# Altium PCB alarmClock.PcbDoc
Units mm, origin at the board's own origin, x right, y up, seen from the top; angles counter-clockwise.
Board outline 80.2 x 100.2 mm, 2 copper layers (Top Layer, Bottom Layer); 155 components, 147 nets, 549 pads, 0 vias.
Unrouted connection lines stored in the file: 316.
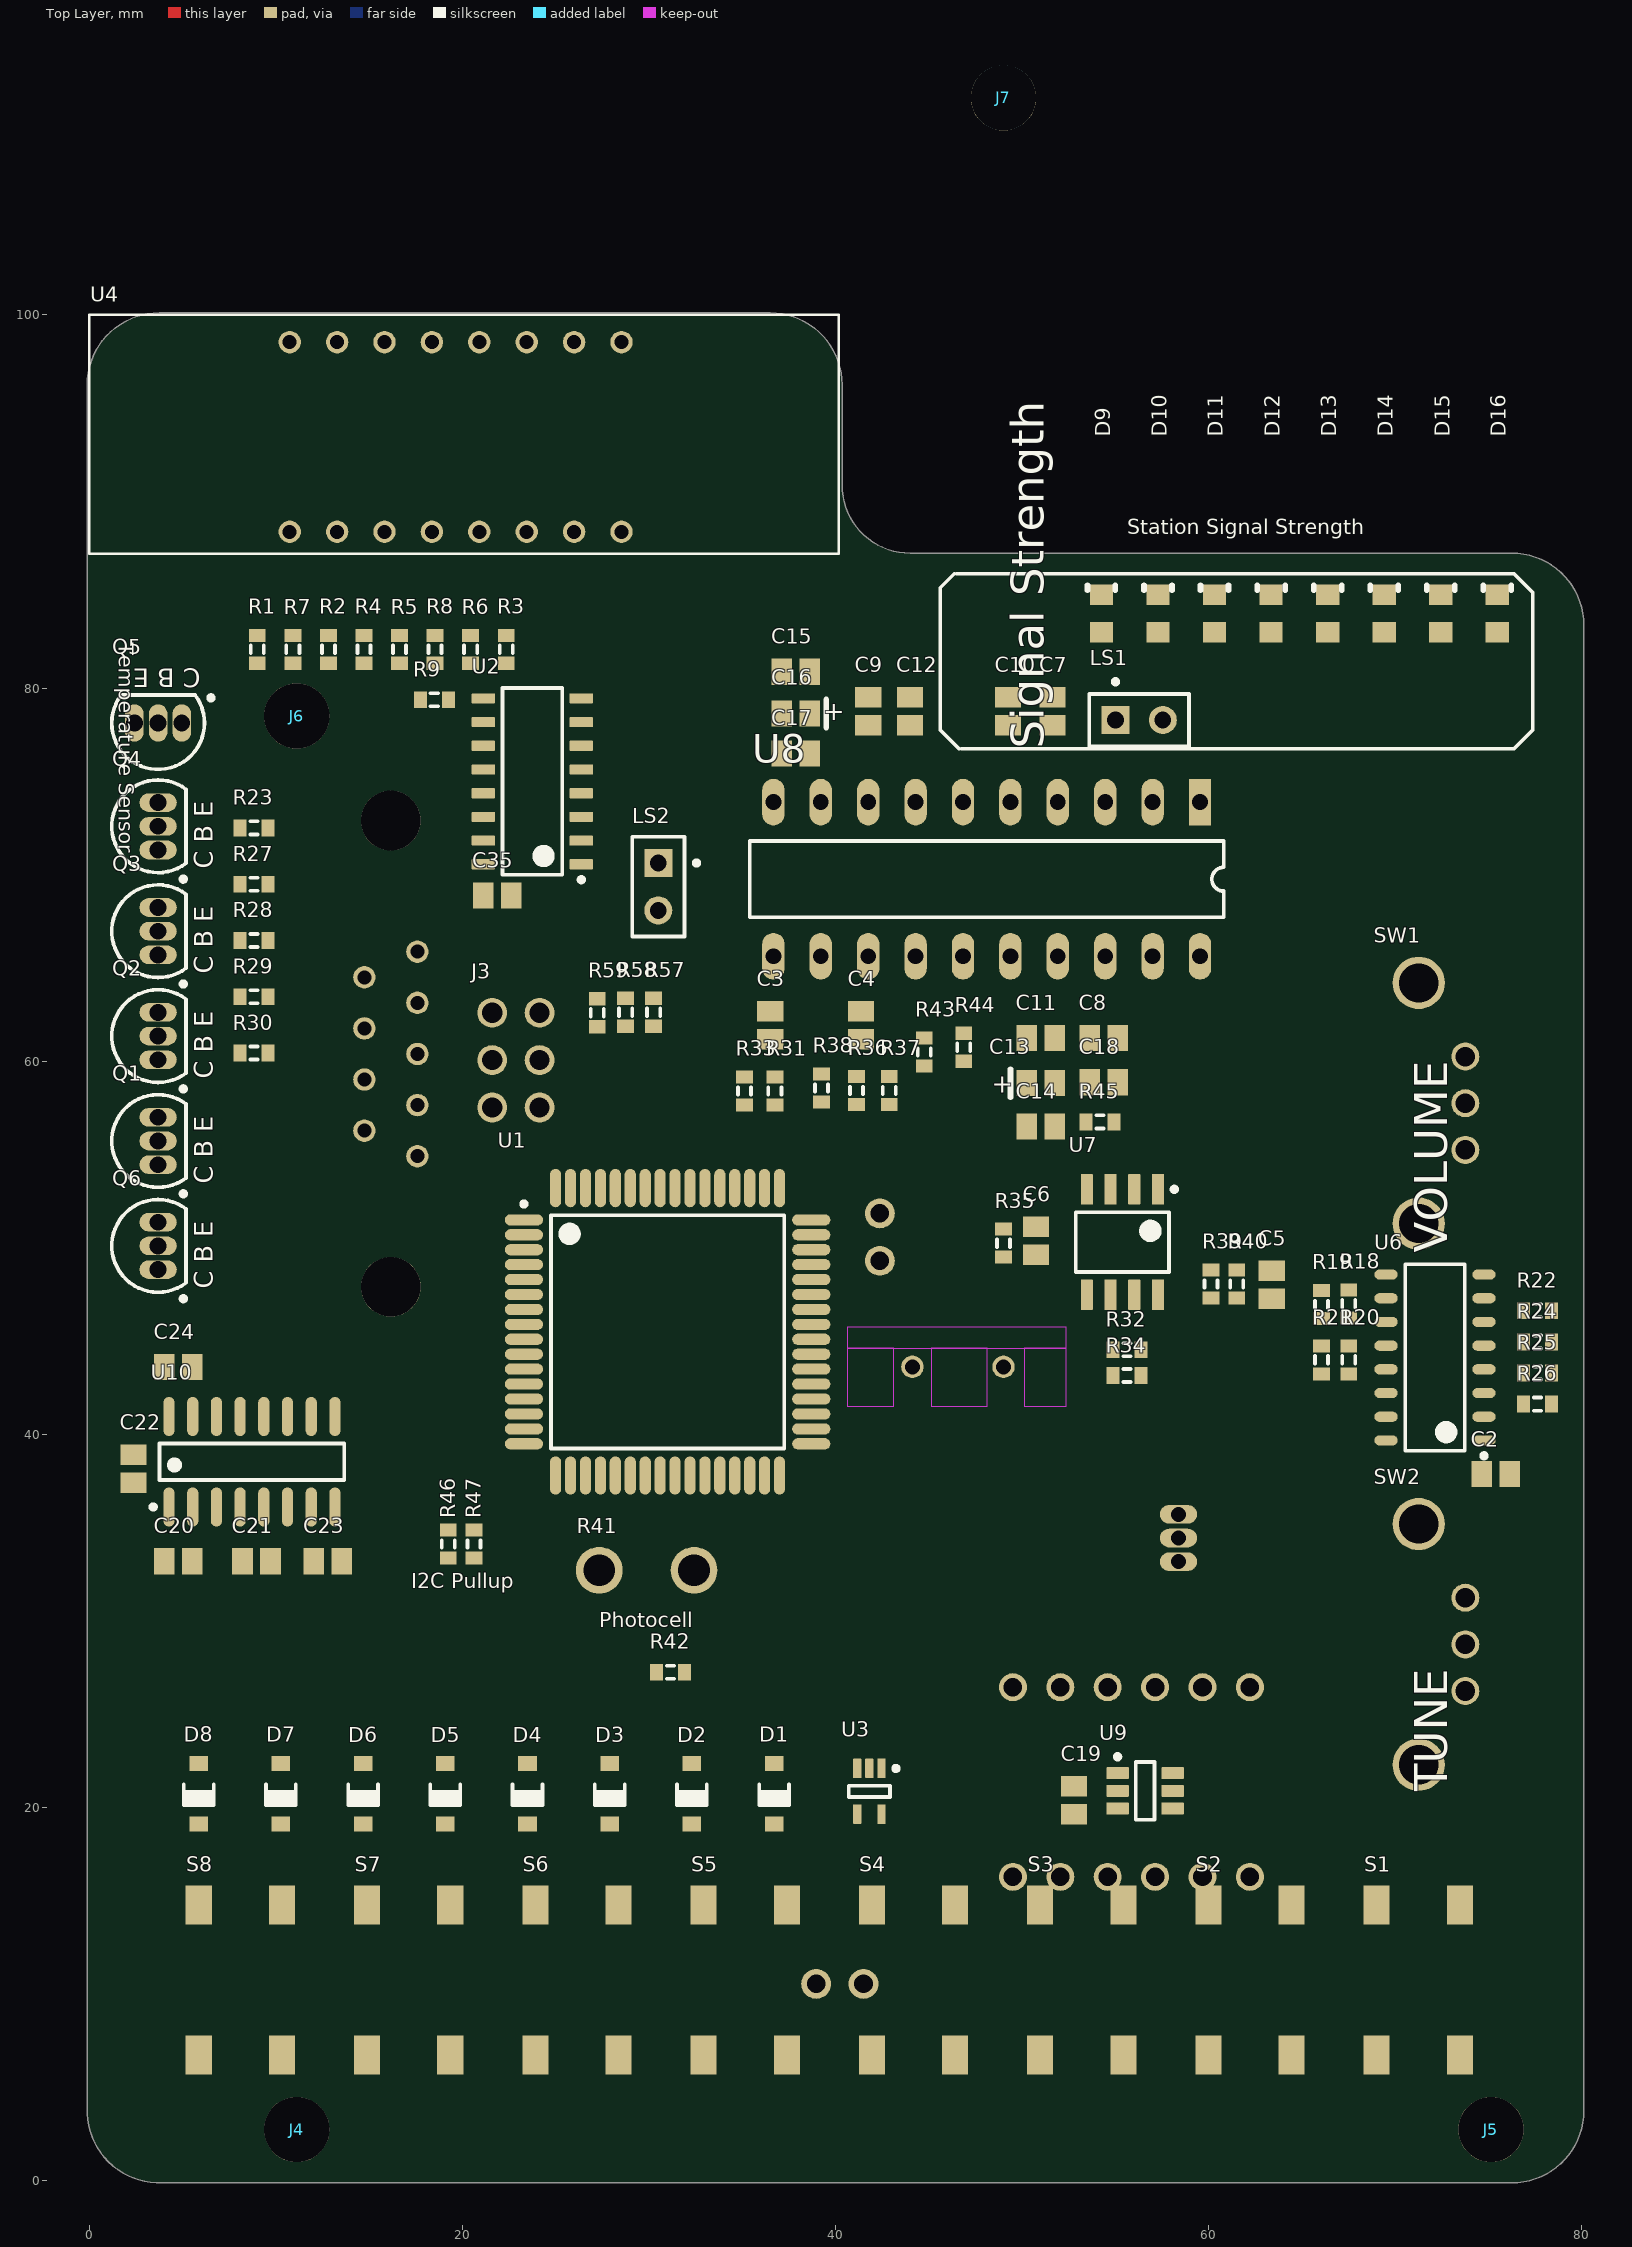
[diagram p0: Top Layer view]
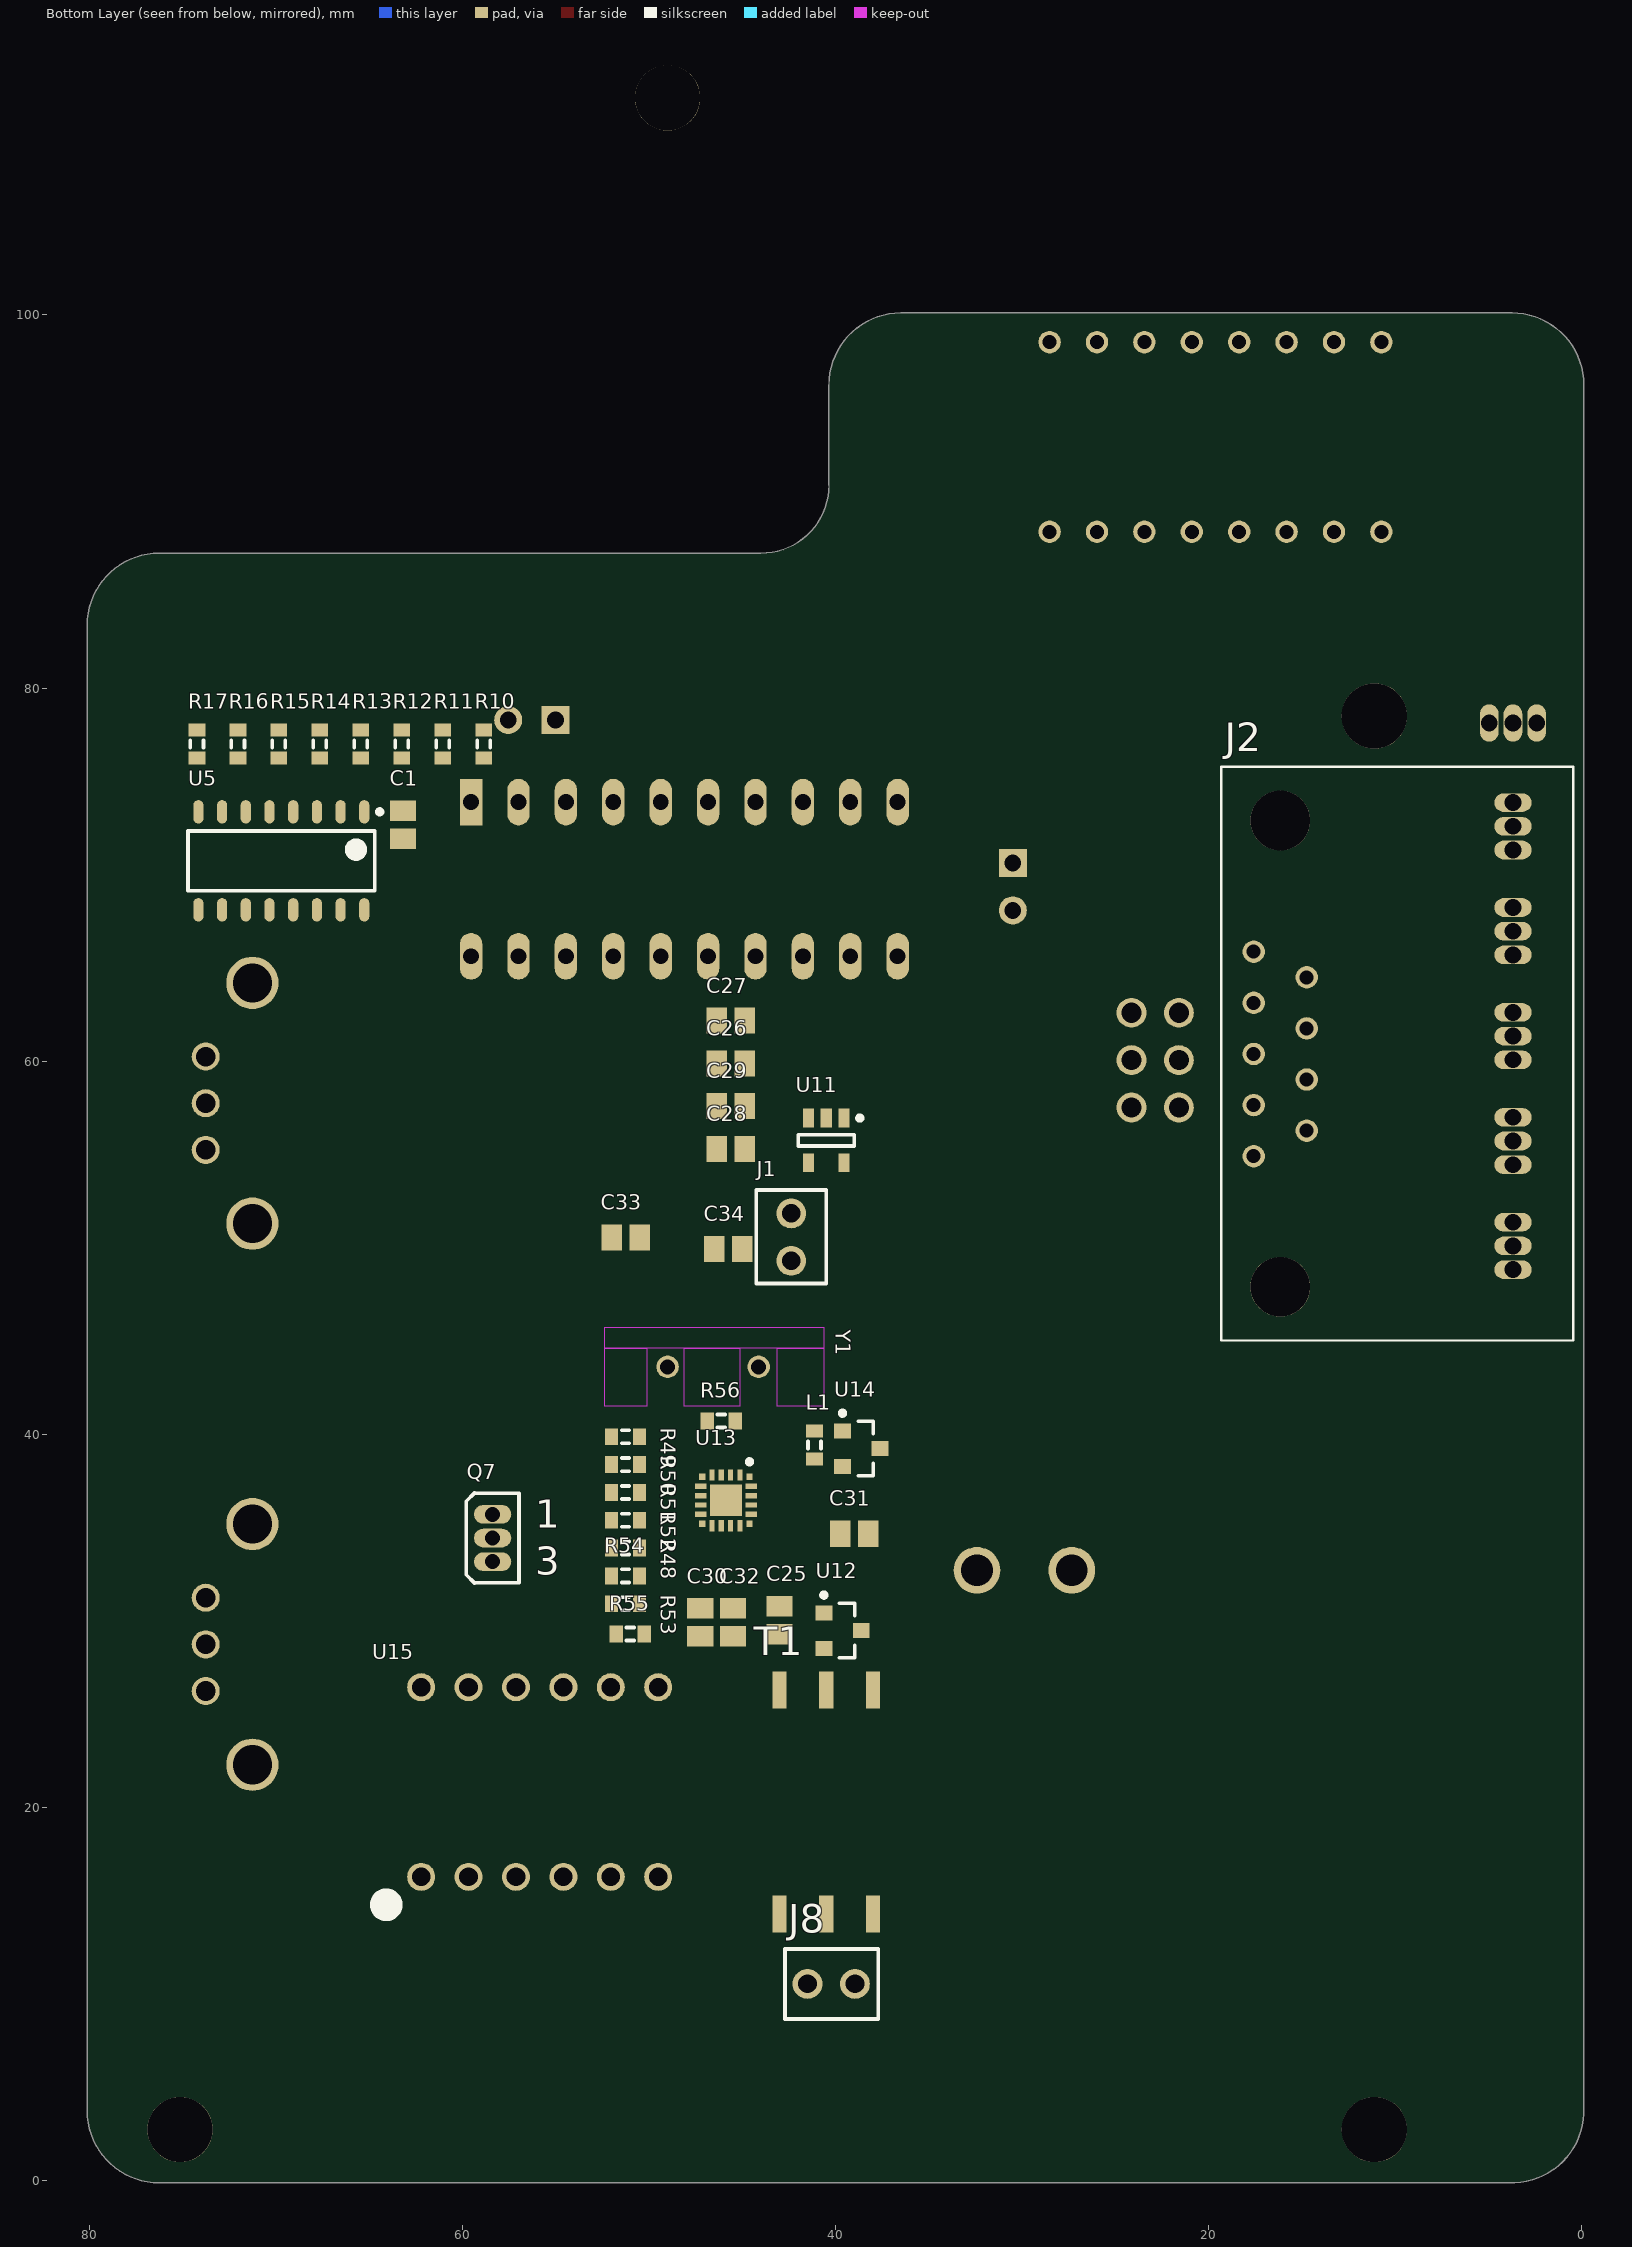
[diagram p1: Bottom Layer view, seen from below]

## Layer stack, top to bottom
Top Solder: solder mask 0.0102, Solder Resist, Dk 3.5
Top Layer: signal copper 0.0356
Dielectric 1: dielectric 0.32, FR-4, Dk 4.8
Bottom Layer: signal copper 0.0356
Bottom Solder: solder mask 0.0102, Solder Resist, Dk 3.5

## Board outline
3.601,-0.098 cw(c3.75,3.75) -0.098,3.601 cw(c0,3.625) -0.1,3.625 -0.1,96.25 cw(c3.75,96.25) 3.75,100.1 36.5,100.1 cw(c36.5,96.25) 40.35,96.25 40.35,90.875 ccw(c44,90.875) 44,87.225 76.25,87.225 cw(c76.25,83.375) 80.1,83.375 80.1,3.75 cw(c76.25,3.75) 76.25,-0.1 3.625,-0.1 cw(c3.625,0)

## Design rules (kind name [scope] priority, off if disabled: settings)
Clearance [All] p1: gap=0.178 ignorepadtopadclearanceinfootprint=FALSE
HoleSize [All] p1: absolutevalues=TRUE maxlimit=5 minlimit=0.3 maxpercent=80.000 minpercent=20.000
MinimumSolderMaskSliver [All] p1: minsoldermaskwidth=0.047
PlaneClearance [All] p1: clearance=0.5
PlaneConnect [All] p1: planeconnectstyle=Direct reliefexpansion=0.508 reliefentries=4 reliefconductorwidth=0.254 reliefairgap=0.254
PolygonConnect [All] p1: connectstyle=Direct reliefconductorwidth=0.254 reliefentries=4 polygonreliefangle="90 Angle" airgapwidth=0.254
RoomDefinition radio [InComponentClass('radio')] p1: confinementstyle=ConfineIn formatcopy=TRUE lockcomponents=FALSE outline 73.125,7.721 73.125,67.306 30.25,67.306 30.25,7.721
RoomDefinition audioAmp [InComponentClass('audioAmp')] p2: confinementstyle=ConfineIn formatcopy=TRUE lockcomponents=FALSE outline 27,87.25 27,37.375 70.75,37.375 70.75,87.25
RoutingVias "Power Vias" [(InNetClass('HIGH_POWER') OR InNetClass('MID_POWER'))] p1: holewidth=0.6 width=0.9 viastyle="Through Hole" minholewidth=0.6 minwidth=0.9 maxholewidth=0.8 maxwidth=1.2
RoutingVias "Routing Vias" [All] p2: holewidth=0.5 width=0.8 viastyle="Through Hole" minholewidth=0.5 minwidth=0.8 maxholewidth=0.5 maxwidth=0.8
ShortCircuit NetBreaker [InComponent('J61')] p1: allowed=TRUE
ShortCircuit [All] p2: allowed=FALSE
SilkToSilkClearance [All vs OnLayer('Bottom Overlay')] p1: silktosilkclearance=-1
SilkToSolderMaskClearance [IsPad] p1: minsilkscreentomaskgap=-1 clearancetoexposedcopper=TRUE
SolderMaskExpansion [All] p1: expansion=0.102
Width "Small Component" [HasFootprint('LQFP-64_M')] p1: maxlimit=0.152 minlimit=0.152 preferedwidth=0.152
Width "High Power Traces" [InNetClass('HIGH_POWER')] p2: maxlimit=4 minlimit=0.2 preferedwidth=2
Width "Mid Power Traces" [InNetClass('MID_POWER')] p3: maxlimit=4 minlimit=0.1 preferedwidth=0.8
Width [All] p4: maxlimit=0.254 minlimit=0.254 preferedwidth=0.254
23 further rules are at their usual default settings.

## Classes and differential pairs
component class radio: C25 C26 C27 C28 C29 C30 C31 C32 C33 C34 J1 J8 L1 Q7 R48 R49 R50 R51 R52 R53 R54 R55 R56 T1 U11 U12 U13 U14 U15 Y1
component class audioAmp: C3 C4 C5 C6 C7 C8 C9 C10 C11 C12 C13 C14 C15 C16 C17 C18 LS1 LS2 R31 R32 R33 R34 R35 R36 R37 R38 R39 R40 R43 R44 R45 U7 U8

## Components (designator, comment, footprint, x,y, rotation, side; value= is the part's Value field where it differs from the comment)
C1 "0805 style, by default" C0805 63.175,72.666 r90 bottom value=.1uF
C2 "0805 style, by default" C0805 75.375,37.875 r180 top value=.1uF
C3 "0805 style, by default" C0805 36.5,61.936 r270 top value=.1uF
C4 "0805 style, by default" C0805 41.373,61.936 r270 top value=.1uF
C5 "0805 style, by default" C0805 63.375,48.035 r90 top value=.1uF
C6 "0805 style, by default" C0805 50.75,50.375 r270 top value=.1uF
C7 "0805 style, by default" C0805 51.625,78.75 r270 top value=1uF
C8 "0805 style, by default" C0805 54.375,61.25 r0 top value=.01uF
C9 "0805 style, by default" C0805 41.75,78.75 r270 top value=1uF
C10 "0805 style, by default" C0805 49.25,78.75 r270 top value=1uF
C11 "0805 style, by default" C0805 51,61.25 r180 top value=1uF
C12 "0805 style, by default" C0805 44,78.75 r270 top value=1uF
C13 "10uF" "C0805 POLARIZED TANT" 51,58.825 r0 top
C14 "0805 style, by default" C0805 51,56.5 r180 top value=.47uF
C15 "0805 style, by default" C0805 37.875,80.875 r0 top value=.47uF
C16 "10uF" "C0805 POLARIZED TANT" 37.875,78.638 r180 top
C17 "0805 style, by default" C0805 37.875,76.5 r0 top value=.47uF
C18 "0805 style, by default" C0805 54.375,58.875 r0 top value=.1uF
C19 "0805 style, by default" C0805 52.781,20.395 r270 top value=.1uF
C20 "0805 style, by default" C0805 4.779,33.206 r180 top value=.1uF
C21 "0805 style, by default" C0805 8.97,33.206 r180 top value=.1uF
C22 "0805 style, by default" C0805 2.378,38.171 r270 top value=.1uF
C23 "0805 style, by default" C0805 12.792,33.206 r180 top value=.1uF
C24 "0805 style, by default" C0805 4.779,43.62 r180 top value=.1uF
C25 "0805 style, by default" C0805 43,30.056 r90 bottom value=.47uF
C26 "0805 style, by default" C0805 45.625,59.889 r180 bottom value=.1uF
C27 "0805 style, by default" C0805 45.625,62.181 r180 bottom value=.022uF
C28 "0805 style, by default" C0805 45.625,55.306 r180 bottom value=10uF
C29 "0805 style, by default" C0805 45.625,57.598 r180 bottom value=.022uF
C30 "0805 style, by default" C0805 47.25,29.931 r90 bottom value=.39uF
C31 "0805 style, by default" C0805 39,34.681 r180 bottom value=18pF
C32 "0805 style, by default" C0805 45.5,29.931 r90 bottom value=.39uF
C33 "0805 style, by default" C0805 51.25,50.556 r180 bottom value=22pF
C34 "0805 style, by default" C0805 45.75,49.931 r0 bottom value=22pF
C35 "0805 style, by default" C0805 21.875,68.875 r180 top value=.1uF
D1 "1N4148W" JSCJ-SOD-123-2_V 36.708,20.748 r270 top
D2 "1N4148W" JSCJ-SOD-123-2_V 32.303,20.748 r270 top
D3 "1N4148W" JSCJ-SOD-123-2_V 27.898,20.748 r270 top
D4 "1N4148W" JSCJ-SOD-123-2_V 23.492,20.748 r270 top
D5 "1N4148W" JSCJ-SOD-123-2_V 19.087,20.748 r270 top
D6 "1N4148W" JSCJ-SOD-123-2_V 14.682,20.748 r270 top
D7 "1N4148W" JSCJ-SOD-123-2_V 10.277,20.748 r270 top
D8 "1N4148W" JSCJ-SOD-123-2_V 5.872,20.748 r270 top
D9 "LED2" basic_led 54.25,83 r90 top
D10 "LED2" basic_led 57.28,83 r90 top
D11 "LED2" basic_led 60.31,83 r90 top
D12 "LED2" basic_led 63.34,83 r90 top
D13 "LED2" basic_led 66.369,83 r90 top
D14 "LED2" basic_led 69.399,83 r90 top
D15 "LED2" basic_led 72.429,83 r90 top
D16 "LED2" basic_led 75.459,83 r90 top
J1 "Jumper" Jumper 42.375,51.846 r270 bottom
J2 "DB9" "DSUB CONNECTOR" 17.59,54.91 r90 bottom
J3 "ICSP Header" "ICSP Header" 21.601,62.6 r0 top
J4 "MountingHoles" "Mounting Hole - Single" 11.125,2.75 r0 top
J5 "MountingHoles" "Mounting Hole - Single" 75.125,2.75 r0 top
J6 "MountingHoles" "Mounting Hole - Single" 11.125,78.5 r0 top
J7 "MountingHoles" "Mounting Hole - Single" 49,111.625 r0 top
J8 "Jumper" Jumper 38.96,10.556 r0 bottom
L1 "180nH" J1-0603 41.125,39.431 r270 bottom
LS1 "Speaker" PIN2 55,78.285 r0 top
LS2 "Speaker" PIN2 30.5,70.625 r270 top
Q1 "PNP - MMBT4403" "TO-92A - BJT" 3.697,55.726 r0 top
Q2 "PNP - MMBT4403" "TO-92A - BJT" 3.697,61.348 r0 top
Q3 "PNP - MMBT4403" "TO-92A - BJT" 3.697,66.969 r0 top
Q4 "PNP - MMBT4403" "TO-92A - BJT" 3.697,72.591 r0 top
Q5 "PNP - MMBT4403" "TO-92A - BJT" 3.697,78.125 r90 top
Q6 "PNP - MMBT4403" "TO-92A - BJT" 3.697,50.105 r0 top
Q7 "MOSFET-P" E3 58.375,34.451 r180 bottom
R1 "220" J1-0603 9.015,82.077 r270 top
R2 "220" J1-0603 12.825,82.077 r270 top
R3 "220" J1-0603 22.35,82.077 r270 top
R4 "220" J1-0603 14.73,82.077 r270 top
R5 "220" J1-0603 16.635,82.077 r270 top
R6 "220" J1-0603 20.445,82.077 r270 top
R7 "220" J1-0603 10.92,82.077 r90 top
R8 "220" J1-0603 18.54,82.077 r90 top
R9 "2.7K" J1-0603 18.5,79.375 r180 top
R10 "330" J1-0603 58.857,77.006 r270 bottom
R11 "330" J1-0603 61.052,77.006 r270 bottom
R12 "330" J1-0603 63.248,77.006 r270 bottom
R13 "330" J1-0603 65.443,77.006 r270 bottom
R14 "330" J1-0603 67.638,77.006 r270 bottom
R15 "330" J1-0603 69.833,77.006 r270 bottom
R16 "330" J1-0603 72.029,77.006 r270 bottom
R17 "330" J1-0603 74.224,77.006 r270 bottom
R18 "1K" J1-0603 67.5,47 r90 top
R19 "1K" J1-0603 66.042,46.965 r90 top
R20 "1K" J1-0603 67.5,44 r90 top
R21 "1K" J1-0603 66.041,44 r90 top
R22 "1K" J1-0603 77.625,46.625 r180 top
R23 "2.7K" J1-0603 8.831,72.507 r0 top
R24 "1K" J1-0603 77.625,44.958 r180 top
R25 "1K" J1-0603 77.625,43.292 r180 top
R26 "1K" J1-0603 77.625,41.625 r180 top
R27 "2.7K" J1-0603 8.831,69.491 r0 top
R28 "2.7K" J1-0603 8.831,66.475 r0 top
R29 "2.7K" J1-0603 8.831,63.458 r0 top
R30 "2.7K" J1-0603 8.831,60.442 r0 top
R31 "330K" J1-0603 36.75,58.41 r90 top
R32 "10K" J1-0603 55.625,44.535 r180 top
R33 "5.7K" J1-0603 35.125,58.41 r90 top
R34 "100K" J1-0603 55.625,43.16 r180 top
R35 "100K" J1-0603 49,50.25 r270 top
R36 "330K" J1-0603 41.123,58.436 r90 top
R37 "10K" J1-0603 42.873,58.436 r270 top
R38 "5.7K" J1-0603 39.248,58.561 r90 top
R39 "100K" J1-0603 60.123,48.061 r90 top
R40 "100K" J1-0603 61.498,48.061 r90 top
R41 "Res Adj1" PHOTOCELL 32.419,32.721 r180 top value=10K
R42 "10K" J1-0603 31.149,27.26 r180 top
R43 "10K" J1-0603 44.75,60.5 r270 top
R44 "10K" J1-0603 46.875,60.75 r90 top
R45 "1M" J1-0603 54.175,56.75 r0 top
R46 "10K" J1-0603 19.25,34.125 r270 top
R47 "10K" J1-0603 20.625,34.125 r270 top
R48 "1K" J1-0603 51.25,33.912 r0 bottom
R49 "10K" J1-0603 51.25,39.875 r0 bottom
R50 "10K" J1-0603 51.25,38.384 r0 bottom
R51 "10K" J1-0603 51.25,36.894 r0 bottom
R52 "DNP" J1-0603 51.25,35.403 r0 bottom
R53 "1K" J1-0603 51.25,30.931 r0 bottom
R54 "10K" J1-0603 51.25,32.422 r180 bottom
R55 "10K" J1-0603 51,29.306 r180 bottom
R56 "10K" J1-0603 46.125,40.721 r180 bottom
R57 "1K" J1-0603 30.25,62.625 r90 top
R58 "1K" J1-0603 28.75,62.625 r90 top
R59 "1K" J1-0603 27.226,62.6 r90 top
S1 "SW-PB" SW-PB 73.457,14.789 r0 top
S2 "SW-PB" SW-PB 64.44,14.789 r0 top
S3 "SW-PB" SW-PB 55.423,14.789 r0 top
S4 "SW-PB" SW-PB 46.406,14.789 r0 top
S5 "SW-PB" SW-PB 37.389,14.789 r0 top
S6 "SW-PB" SW-PB 28.372,14.789 r0 top
S7 "SW-PB" SW-PB 19.355,14.789 r0 top
S8 "SW-PB" SW-PB 10.338,14.789 r0 top
SW1 "ENCODER" ENCODER 73.75,57.75 r90 top
SW2 "ENCODER" ENCODER 73.75,28.75 r90 top
T1 "RF Transformer" "WB Series RF Transformers" 43,14.306 r90 bottom
U1 "ATmega128Lâ€“8AN" 64A_M 31,45.5 r0 top
U2 "CD74HC138M96" D0016A_L#1 23.75,75 r180 top
U3 "SN74LVC1G125DCKR" DCK0005A_M 41.813,20.878 r270 top
U4 "7SegDisplay" LTC-4627JS 10.75,88.375 r0 top
U5 "CD74HC595M96" D0016A_L#2 69.699,70.741 r270 bottom
U6 "SN74HC165DR" D0016A_L#2 72.125,44.125 r180 top
U7 "LMC6032IMX" D0008A_M 55.373,50.311 r270 top
U8 "TPA6021A4 Amplifier" DIP20 59.53,73.885 r270 top
U9 "LM73CIMK-0/NOPB" DDC0006A_M 56.591,20.903 r0 top
U10 "SP3232EBCN-L/TR" EXAR-NSOIC-16_N 8.728,38.54 r90 top
U11 "3v3 Linear Reg" SOT95P245X110-5N 40.5,55.756 r270 bottom
U12 "CM1213A-01SO" ONSC-SOT-23-3-318-08_V 39.625,29.491 r180 bottom
U13 "Si4734-D60-GM" SLAB-QFN-20-1700x1700TP_V 45.875,36.471 r270 bottom
U14 "CM1213A-01SO" ONSC-SOT-23-3-318-08_V 38.625,39.241 r180 bottom
U15 "Sparkfun LLC" "Sparkfun LLC" 62.205,16.294 r180 bottom
Y1 "XTAL" XTAL_PDB 44.12,43.625 r0 bottom

## Footprints (in the part's own frame and the unit in brackets; to place one, negate y for a bottom-side part, rotate by r counter-clockwise, add the part's x,y. Pads: shape width x height; smd on the part's side, far side on the other; paste and mask are expansions set on the pad)
64A_M [mm] "Thin QFP, 64-Leads, Body 14x14mm, Pitch 0.8mm, IPC Low Density"
  oval 2.05x0.6 smd: 1(-7.7,6) 2(-7.7,5.2) 3(-7.7,4.4) 4(-7.7,3.6) 5(-7.7,2.8) 6(-7.7,2) 7(-7.7,1.2) 8(-7.7,0.4) 9(-7.7,-0.4) 10(-7.7,-1.2) 11(-7.7,-2) 12(-7.7,-2.8) 13(-7.7,-3.6) 14(-7.7,-4.4) 15(-7.7,-5.2) 16(-7.7,-6) 33(7.7,-6) 34(7.7,-5.2) 35(7.7,-4.4) 36(7.7,-3.6) 37(7.7,-2.8) 38(7.7,-2) 39(7.7,-1.2) 40(7.7,-0.4) 41(7.7,0.4) 42(7.7,1.2) 43(7.7,2) 44(7.7,2.8) 45(7.7,3.6) 46(7.7,4.4) 47(7.7,5.2) 48(7.7,6)
  oval 0.6x2.05 smd: 17(-6,-7.7) 18(-5.2,-7.7) 19(-4.4,-7.7) 20(-3.6,-7.7) 21(-2.8,-7.7) 22(-2,-7.7) 23(-1.2,-7.7) 24(-0.4,-7.7) 25(0.4,-7.7) 26(1.2,-7.7) 27(2,-7.7) 28(2.8,-7.7) 29(3.6,-7.7) 30(4.4,-7.7) 31(5.2,-7.7) 32(6,-7.7) 49(6,7.7) 50(5.2,7.7) 51(4.4,7.7) 52(3.6,7.7) 53(2.8,7.7) 54(2,7.7) 55(1.2,7.7) 56(0.4,7.7) 57(-0.4,7.7) 58(-1.2,7.7) 59(-2,7.7) 60(-2.8,7.7) 61(-3.6,7.7) 62(-4.4,7.7) 63(-5.2,7.7) 64(-6,7.7)
  silkscreen extent -7.82,-6.25 6.25,6.97, body extent -7,-7 7,7, height 1.6
basic_led [mm]
  rect 1.1x1.25 smd: 1(0,0) 2(2,0)
  silkscreen extent 2.25,-0.75 2.5,0.75, body extent 0,-0.62 2,0.63, height 1.1
C0805 [mm] "Chip Capacitor, Body 2.0x1.3mm, IPC High Density"
  rect 1.1x1.4 smd: 1(-0.75,0) 2(0.75,0)
  body extent -1.1,-0.72 1.1,0.72, height 1.4
"C0805 POLARIZED TANT" [mm] "Chip Capacitor, Body 2.0x1.3mm, IPC High Density"
  rect 1.1x1.4 smd: 1(-0.75,0) 2(0.75,0)
  silkscreen extent -1.63,-0.75 -1.63,0.75, body extent -1.1,-0.72 1.1,0.72, height 1.4
D0008A_M [mm] "SOIC, 8-Leads, Body 5x4mm, Pitch 1.27mm, IPC Low Density"
  rrect15% 1.65x0.65 smd: 1(-2.825,1.905) 2(-2.825,0.635) 3(-2.825,-0.635) 4(-2.825,-1.905) 5(2.825,-1.905) 6(2.825,-0.635) 7(2.825,0.635) 8(2.825,1.905)
  silkscreen extent -2.95,-2.5 1.6,2.91, body extent -3,-2.45 3,2.45, height 1.63
D0016A_L#1 [mm] "SOIC, 16-Leads, Body 10x4mm, Pitch 1.27mm, IPC High Density"
  rrect18% 1.25x0.55 smd: 1(-2.625,4.445) 2(-2.625,3.175) 3(-2.625,1.905) 4(-2.625,0.635) 5(-2.625,-0.635) 6(-2.625,-1.905) 7(-2.625,-3.175) 8(-2.625,-4.445) 9(2.625,-4.445) 10(2.625,-3.175) 11(2.625,-1.905) 12(2.625,-0.635) 13(2.625,0.635) 14(2.625,1.905) 15(2.625,3.175) 16(2.625,4.445)
  silkscreen extent -2.75,-5 1.6,5.39, body extent -3,-4.95 3,4.95, height 1.59
D0016A_L#2 [mm] "SOIC, 16-Leads, Body 10x4mm, Pitch 1.27mm, IPC High Density"
  oval 1.25x0.55 smd: 1(-2.625,4.445) 2(-2.625,3.175) 3(-2.625,1.905) 4(-2.625,0.635) 5(-2.625,-0.635) 6(-2.625,-1.905) 7(-2.625,-3.175) 8(-2.625,-4.445) 9(2.625,-4.445) 10(2.625,-3.175) 11(2.625,-1.905) 12(2.625,-0.635) 13(2.625,0.635) 14(2.625,1.905) 15(2.625,3.175) 16(2.625,4.445)
  silkscreen extent -2.75,-5 1.6,5.39, body extent -3,-4.95 3,4.95, height 1.59
DCK0005A_M [mm] "SOT23, 5-Leads, Body 2.15x1.4mm, Pitch 0.65mm, IPC Low Density"
  rrect22% 1.05x0.45 smd: 1(-1.225,0.65) 2(-1.225,0) 3(-1.225,-0.65) 4(1.225,-0.65) 5(1.225,0.65)
  silkscreen extent -1.35,-1.1 0.3,1.55, body extent -1.14,-1 1.14,1, height 0.94
DDC0006A_M [mm] "SOT23, 6-Leads, Body 3.05x1.75mm, Pitch 0.95mm, IPC Low Density"
  rrect15% 1.2x0.65 smd: 1(-1.475,0.95) 2(-1.475,0) 3(-1.475,-0.95) 4(1.475,-0.95) 5(1.475,0) 6(1.475,0.95)
  silkscreen extent -1.6,-1.55 0.5,1.95, body extent -1.43,-1.48 1.43,1.49, height 0.9
DIP20 [mm]
  rect 2.5x1.2 hole 0.85: 1(0,0)
  oval 2.5x1.2 hole 0.85: 2(0,-2.54) 3(0,-5.08) 4(0,-7.62) 5(0,-10.16) 6(0,-12.7) 7(0,-15.24) 8(0,-17.78) 9(0,-20.32) 10(0,-22.86) 11(8.26,-22.86) 12(8.26,-20.32) 13(8.26,-17.78) 14(8.26,-15.24) 15(8.26,-12.7) 16(8.26,-10.16) 17(8.26,-7.62) 18(8.26,-5.08) 19(8.26,-2.54) 20(8.26,0)
  silkscreen extent 2.08,-24.13 6.18,1.27
"DSUB CONNECTOR" [mm]
  round 1.2 hole 0.75: 1(0,0) 2(2.74,0) 3(5.48,0) 4(8.22,0) 5(10.96,0) 6(1.37,-2.84) 7(4.11,-2.84) 8(6.85,-2.84) 9(9.59,-2.84)
  round 3.2 hole 3.2: A(-7,-1.42) A(17.99,-1.42)
  silkscreen extent -9.87,-17.13 20.88,1.75, body extent -9.9,-17.15 20.91,1.7, height 12.68
E3 [mm] "TO, Flat Index; 3 In-Line, Axial Leads; Body Dia. 4.6mm; Lead Dia. 0.5 mm (max)"
  oval 2x1 hole 0.8: 1(0,1.27) 2(0,0) 3(0,-1.27)
  silkscreen extent -1.41,-2.41 1.41,2.41
ENCODER [mm]
  round 1.5 hole 1.05: 1(-2.5,0) 2(0,0) 3(2.5,0)
  round 2.8 hole 2.1: A(-6.45,2.5) A(6.45,2.5)
  body extent -6.41,-14.87 6.41,5.03, height 3.4
EXAR-NSOIC-16_N [mm] "SOIC, 16-Leads, Body 9.90x3.90mm, Pitch 1.27mm, IPC Medium Density"
  oval 2.1x0.6 smd: 1(-2.425,4.445) 2(-2.425,3.175) 3(-2.425,1.905) 4(-2.425,0.635) 5(-2.425,-0.635) 6(-2.425,-1.905) 7(-2.425,-3.175) 8(-2.425,-4.445) 9(2.425,-4.445) 10(2.425,-3.175) 11(2.425,-1.905) 12(2.425,-0.635) 13(2.425,0.635) 14(2.425,1.905) 15(2.425,3.175) 16(2.425,4.445)
  silkscreen extent -2.55,-4.95 0.98,5.42, body extent -1.95,-4.95 1.95,4.95, height 1.75
"ICSP Header" [mm]
  round 1.6 hole 1.08: 1(0,0) 2(2.54,0) 3(0,-2.54) 4(2.54,-2.54) 5(0,-5.08) 6(2.54,-5.08)
  body extent -1.25,-6.44 3.75,1.18, height 8
J1-0603 [mm] "Chip Resistor, Body 1.6x0.8mm, IPC High Density"
  rect 0.7x0.9 smd: 1(-0.75,0) 2(0.75,0)
  silkscreen extent -0.2,-0.35 0.2,0.35, body extent -0.85,-0.48 0.85,0.48, height 0.9
JSCJ-SOD-123-2_V [mm] "SMD, 2-Leads, Body 2.7x1.6mm, Height 1.25mm"
  rect 0.8x1 smd: 1(-1.62,0) 2(1.62,0)
  silkscreen extent -0.5,-0.8 0.6,0.8, body extent -1.35,-0.8 1.35,0.8, height 1.25
Jumper [mm]
  round 1.6 hole 1: 1(0,0) 2(2.54,0)
  silkscreen extent -1.25,-1.88 3.75,1.88
LTC-4627JS [mm]
  round 1.2 hole 0.75: 1(0,0) 2(2.54,0) 3(5.08,0) 4(7.62,0) 5(10.16,0) 6(12.7,0) 7(15.24,0) 8(17.78,0) 9(17.78,10.16) 10(15.24,10.16) 11(12.7,10.16) 12(10.16,10.16) 13(7.62,10.16) 14(5.08,10.16) 15(2.54,10.16) 16(0,10.16)
  silkscreen extent -10.75,-1.17 29.43,11.63, body extent -6.87,-2.75 23.12,11.25, height 7.73
"Mounting Hole - Single" [mm]
  round 3.5 hole 3.5: A(0,0)
ONSC-SOT-23-3-318-08_V [mm] "SOT23, 3-Leads, Body 2.92x1.3mm, Pitch 0.95mm"
  rect 0.9x0.8 smd: 1(-1,0.95) 2(-1,-0.95) 3(1,0)
  silkscreen extent -1.13,-1.46 0.65,2.02, body extent -0.65,-1.46 0.65,1.46, height 1.11
PHOTOCELL [mm] "https://www.adafruit.com/products/161"
  round 2.5 hole 1.7: 1(0,0) 2(5.08,0)
PIN2 [mm] "Photosensitive Diode; 2 Leads"
  rect 1.5x1.5 hole 0.9: 1(0,0)
  round 1.5 hole 0.9: 2(2.54,0)
  silkscreen extent -1.4,-1.4 3.94,2.17
SLAB-QFN-20-1700x1700TP_V [mm] "QFN, 20-Leads, Body 3x3mm, Pitch 0.5mm, Thermal Pad 1.7x1.7mm"
  rect 0.34x0.34 smd: 1(-1.265,1.265) 6(-1.265,-1.265) 11(1.265,-1.265) 16(1.265,1.265)
  rect 0.61x0.28 smd: 2(-1.355,0.75) 3(-1.355,0.25) 4(-1.355,-0.25) 5(-1.355,-0.75) 12(1.355,-0.75) 13(1.355,-0.25) 14(1.355,0.25) 15(1.355,0.75)
  rect 0.28x0.61 smd: 7(-0.75,-1.355) 8(-0.25,-1.355) 9(0.25,-1.355) 10(0.75,-1.355) 17(0.75,1.355) 18(0.25,1.355) 19(-0.25,1.355) 20(-0.75,1.355)
  rect 1.7x1.7 smd: 21(0,0)
  silkscreen extent -2.19,1.14 -1.94,1.39, body extent -1.5,-1.5 1.5,1.5, height 0.6
SOT95P245X110-5N [mm] "SOT23, 5-Leads, Body 2.90x2.45mm, Pitch 0.95mm, IPC Medium Density"
  rect 1x0.6 smd: 1(-1.2,0.95) 2(-1.2,0) 3(-1.2,-0.95) 4(1.2,-0.95) 5(1.2,0.95)
  silkscreen extent -1.32,-1.5 0.3,1.92, body extent -0.7,-1.5 0.7,1.5, height 1.1
"Sparkfun LLC" [mm]
  round 1.5 hole 1: 1(0,0) 2(2.54,0) 3(5.08,0) 4(7.62,0) 5(10.16,0) 6(12.7,0) 7(12.7,10.16) 8(10.16,10.16) 9(7.62,10.16) 10(5.08,10.16) 11(2.54,10.16) 12(0,10.16)
  silkscreen extent -2.25,-1.87 -1.5,-1.13
SW-PB [mm]
  rect 1.4x2.1 smd: 1(0,0) 2(-4.46,0) A(-4.46,-8.05) A(0,-8.05)
  body extent -5.12,-9 0.88,1, height 5.05
"TO-92A - BJT" [mm] "TO, Flat Index; 3 In-Line, Axial Leads; Body Dia. 4.5mm; Leads 0.51 x 0.48 mm (max)"
  oval 2x1 hole 0.9: 1(0,-1.27) 2(0,0) 3(0,1.27)
  silkscreen extent -2.48,-2.95 1.5,2.48, body extent -2.48,-2.5 1.5,2.5, height 6.86
"WB Series RF Transformers" [mm]
  rect 2x0.76 smd: 1(0,0) 2(0,-2.5) 3(0,-5) 4(12,-5) 5(12,-2.5) 6(12,0)
  body extent -0.13,-6.63 11.89,1.63, height 6.42
XTAL_PDB [mm]
  round 1.2 hole 0.8: 1(0,0) 2(4.88,0)
  Keep-Out Layer region: 1,2.125 4,2.125 4,-1 1,-1
  Keep-Out Layer region: -3.5,2.125 -1,2.125 -1,-1 -3.5,-1
  Keep-Out Layer region: 6,2.125 8.25,2.125 8.25,-1 6,-1
  Keep-Out Layer region: -3.5,-1 8.25,-1 8.25,-2.125 -3.5,-2.125
  body extent -3.31,-1.88 8.06,2, height 3.5

## Part data
C1 C2 C3 C4 C5 C6 C7 C8 C9 C10 C11 C12 C14 C15 C17 C18 C19 C25 C26 C27 C28 C29 C30 C31 C32 C33 C34 C35: library part Cap, "Capacitor", LatestRevisionDate=17-Jul-2002, LatestRevisionNote="Re-released for DXP Platform.", PackageDescription="Radial Cap, Thru-Hole; 2 Leads; 0.3 in Pin Spacing", PackageReference=RAD-0.3, Published=8-Jun-2000, Publisher="Altium Limited"
C13 C16: library part "Cap Pol", "Polarized Capacitor (Radial)", Capacitance="10000000 pF", Case Code=P, Case Style=Molded, Manufacturer="Kyocera / AVX", Manufacturer Part Number=F920J106MPA, Operating Temp Range="-55C to 125C", Supplier Part Number 1=478-8115-1-ND, Tolerance (+ or -)=20%, Voltage=6.3VDC, ComponentLink1Description=https://datasheet.ciiva.com/14863/f92-14863120.pdf, ComponentLink1URL=https://datasheet.ciiva.com/14863/f92-14863120.pdf, ComponentLink2Description=https://datasheet.ciiva.com/30526/getdatasheetpartid-436170-30526657.pdf, ComponentLink2URL=https://datasheet.ciiva.com/30526/getdatasheetpartid-436170-30526657.pdf, ComponentLink3Description=https://datasheet.ciiva.com/14599/70188318-14599013.pdf, ComponentLink3URL=https://datasheet.ciiva.com/14599/70188318-14599013.pdf, ComponentLink4Description=https://datasheet.ciiva.com/17336/e-f92-17336710.pdf, ComponentLink4URL=https://datasheet.ciiva.com/17336/e-f92-17336710.pdf, ComponentLink5Description=https://datasheet.ciiva.com/7654/e-f92-7654794.pdf, ComponentLink5URL=https://datasheet.ciiva.com/7654/e-f92-7654794.pdf, ComponentLink6Description=https://datasheet.ciiva.com/11223/e-f92-11223515.pdf, ComponentLink6URL=https://datasheet.ciiva.com/11223/e-f92-11223515.pdf, ComponentLink7Description=https://datasheet.ciiva.com/257/e-f92-257500.pdf, ComponentLink7URL=https://datasheet.ciiva.com/257/e-f92-257500.pdf, ComponentLink8Description=https://datasheet.ciiva.com/257/e-f92-257501.pdf, ComponentLink8URL=https://datasheet.ciiva.com/257/e-f92-257501.pdf, ComponentLink9Description=https://datasheet.ciiva.com/14863/f92-14863133.pdf, ComponentLink9URL=https://datasheet.ciiva.com/14863/f92-14863133.pdf, ComponentLink10Description=https://datasheet.ciiva.com/257/e-f92-257502.pdf, ComponentLink10URL=https://datasheet.ciiva.com/257/e-f92-257502.pdf, ComponentLink11Description=https://datasheet.ciiva.com/14863/f92-14863118.pdf, ComponentLink11URL=https://datasheet.ciiva.com/14863/f92-14863118.pdf, Construction="SMT Chip", DCL="0.6 uA", DF=10%, ESR="6 ohm", Failure Rate="Not Required", Insulation="Not Required", Lead Spacing (nom)="Not Required mm", Length W/Weld="Not Required mm", Mounting Style="Surface Mount", Packaging="Tape and Reel", Polarity=Polar, Pricing 1="1=0.31, 10=0.218, 25=0.1792, 50=0.1528, 100=0.131, 250=0.1092, 500=0.0983, 1000=0.083 (USD)", Product Depth (mm)="1.25 mm", Product Diameter (mm)="Not Required mm", Product Height (mm)="1.1 mm", Product Length (mm)="2 mm", Rad Hardened=No, Seal="Not Required", Seated Plane Height="Not Required mm", Stock 1=99324, Supplier 1=Digikey, Wire Form="Not Required"
C20 C21 C22 C23 C24: library part Cap, "Capacitor", Capacitance=0.10µF, Manufacturer="Murata Electronics North America", Manufacturer Part Number=GRM21BR71H104JA01L, Operating Temperature="-55°C ~ 125°C", Package / Case="0805 (2012 Metric)", Ratings=-, Supplier Part Number 1=490-10782-1-ND, Temperature Coefficient=X7R, Tolerance=±5%, Voltage - Rated=50V, Applications="General Purpose", Category=Capacitors, ComponentLink1Description=http://www.murata.com/~/media/webrenewal/support/library/catalog/products/capacitor/mlcc/c02e.pdf, ComponentLink1URL=http://www.murata.com/~/media/webrenewal/support/library/catalog/products/capacitor/mlcc/c02e.pdf, Features=-, Height - Seated (Max)=-, LatestRevisionDate=17-Jul-2002, LatestRevisionNote="Re-released for DXP Platform.", Lead Spacing=-, Lead Style=-, Mounting Type="Surface Mount, MLCC", PackageDescription="Radial Cap, Thru-Hole; 2 Leads; 0.3 in Pin Spacing", PackageReference=RAD-0.3, Packaging="Cut Tape (CT)", Pricing 1="1=0.16, 10=0.113, 50=0.065, 100=0.0537, 250=0.0452, 500=0.03786, 1000=0.03108 (USD)", Published=8-Jun-2000, Publisher="Altium Limited", RoHS="RoHS Compliant", Size / Dimension="0.079\" L x 0.049\" W (2.00mm x 1.25mm)", Stock 1=17503, Supplier 1=Digi-Key, Thickness (Max)="0.053\" (1.35mm)"
D1 D2 D3 D4 D5 D6 D7 D8: library part CMP-0914-00001-1, "Fast Switching Diode, 75 V, 150 mA, 2-Pin 2.7 x 1.6 x 1.25 mm SMD, Tape and Reel", Average Forward Current-Max="0.15 A", Manufacturer="Changjiang Electronics", Manufacturer Part Number=1N4148W-TP, Peak Current-Max="2 A", Power Dissipation="400 mW", Reverse Voltage-Max [Vrrm]="100 V", Supplier Part Number 1=1N4148WTPMSCT-ND, ComponentLink1Description="Manufacturer URL", ComponentLink1URL=http://www.cj-elec.com/, ComponentLink2Description=Datasheet, ComponentLink2URL=http://www.cj-elec.com/txUpfile/20121613352740313.pdf, ComponentLink3Description="Package Specification", ComponentLink3URL=http://www.cj-elec.com/txUpfile/201412112231195145.pdf, ComponentLink4Description=https://datasheet.ciiva.com/1243/1684829-1243908.pdf, ComponentLink4URL=https://datasheet.ciiva.com/1243/1684829-1243908.pdf, ComponentLink5Description=https://datasheet.ciiva.com/16836/1n4148wsod123-16836277.pdf, ComponentLink5URL=https://datasheet.ciiva.com/16836/1n4148wsod123-16836277.pdf, ComponentLink6Description=https://datasheet.ciiva.com/4435/1n4148wsod123-48460-4435223.pdf, ComponentLink6URL=https://datasheet.ciiva.com/4435/1n4148wsod123-48460-4435223.pdf, ComponentLink7Description=https://datasheet.ciiva.com/14557/70055519-14557767.pdf, ComponentLink7URL=https://datasheet.ciiva.com/14557/70055519-14557767.pdf, ComponentLink8Description=https://datasheet.ciiva.com/911/1n4148wsod123-911676.pdf, ComponentLink8URL=https://datasheet.ciiva.com/911/1n4148wsod123-911676.pdf, ComponentLink9Description=https://datasheet.ciiva.com/7622/1684829-7622556.pdf, ComponentLink9URL=https://datasheet.ciiva.com/7622/1684829-7622556.pdf, ComponentLink10Description=https://datasheet.ciiva.com/911/1n4148wsod123-911677.pdf, ComponentLink10URL=https://datasheet.ciiva.com/911/1n4148wsod123-911677.pdf, ComponentLink11Description=https://datasheet.ciiva.com/911/1n4148wsod123-911678.pdf, ComponentLink11URL=https://datasheet.ciiva.com/911/1n4148wsod123-911678.pdf, ComponentLink12Description=https://datasheet.ciiva.com/22747/1684829-22747439.pdf, ComponentLink12URL=https://datasheet.ciiva.com/22747/1684829-22747439.pdf, DatasheetVersion="Rev. A", IO (mA)=150, IR (uA)=1, Mounting Technology="Surface Mount", PackageDescription="2-Pin SMD, Body 2.7 x 1.6 mm, Height 1.25 mm", PackageReference=SOD-123-2, PackageVersion="Rev. A", Packing="Tape and Reel", PartNumber=1N4148W, PD (mW)=350, Pricing 1="1=0.14, 10=0.125, 25=0.1132, 100=0.0815, 250=0.048, 500=0.0399, 1000=0.0272 (USD)", Reverse Recovery Time-Max="4 ns", Stock 1=1103127, Supplier 1=Digikey, Trr (ns)=4, TSTG (degC)="-55 to 150", VF (V)=1.25, VR (V)=75
D9 D10 D11 D12 D13 D14 D15 D16: "Typical RED, GREEN, YELLOW, AMBER GaAs LED", LatestRevisionDate=17-Jul-2002, LatestRevisionNote="Re-released for DXP Platform.", PackageDescription="SM LED; 2 Flat Leads", PackageReference=3.2X1.6X1.1, PackageVersion=Feb-2002, Published=8-Jun-2000, Publisher="Altium Limited"
J2: Color=Black, Current Rating=5A, Manufacturer="Amphenol / FCI", Manufacturer Part Number=D09P33E4GV00LF, Operating Temperature="-55°C ~ 125°C", Supplier Part Number 1=609-1480-ND, Voltage Rating=300V, Category="Connectors, Interconnects", ComponentLink1Description=https://datasheet.ciiva.com/16915/70236919-16915382.pdf, ComponentLink1URL=https://datasheet.ciiva.com/16915/70236919-16915382.pdf, ComponentLink2Description=https://datasheet.ciiva.com/15177/getdatasheetpartid-123290-15177610.pdf, ComponentLink2URL=https://datasheet.ciiva.com/15177/getdatasheetpartid-123290-15177610.pdf, ComponentLink3Description=https://datasheet.ciiva.com/10376/c01-8646-0151-10376667.pdf, ComponentLink3URL=https://datasheet.ciiva.com/10376/c01-8646-0151-10376667.pdf, ComponentLink4Description=https://datasheet.ciiva.com/652/c01-8646-0151-652476.pdf, ComponentLink4URL=https://datasheet.ciiva.com/652/c01-8646-0151-652476.pdf, ComponentLink5Description=https://datasheet.ciiva.com/16663/c01-8646-0151-16663004.pdf, ComponentLink5URL=https://datasheet.ciiva.com/16663/c01-8646-0151-16663004.pdf, Connector Style=D-Sub, Connector Type="Plug, Male Pins", Contact Finish=Gold, Contact Finish Thickness=Flash, Contact Type=Signal, Family="D-Sub Connectors", Features="Board Lock, Grounding Indents", Flange Feature="Mating Side, Female Screwlock (4-40)", Housing Material="Polybutylene Terephthalate (PBT)", Ingress Protection=-, Mounting Type="Through Hole, Right Angle", Number of Positions=9, Number of Rows=2, Packaging=Tray, Pricing 1="1=2.3, 10=2.086, 25=1.958, 50=1.8728, 100=1.7877, 250=1.6175, 500=1.4898, 1000=1.277, 2500=1.1918 (USD)", Series="Delta D", Shell Material, Finish="Steel, Tin Plated", Shell Size, Connector Layout="1 (DE, E)", Stock 1=5536, Supplier 1=Digikey, Termination=Solder
L1: library part Inductor, "Inductor", Current Rating=140mA, DC Resistance (DCR)="2.2 Ohm Max", Frequency - Self Resonant=1.3GHz, Frequency - Test=100MHz, Manufacturer=Murata, Manufacturer Part Number=LQW18ANR18J00D, Operating Temperature="-55°C ~ 125°C", Package / Case="0603 (1608 Metric)", Q @ Freq="25 @ 100MHz", Standard Package=1, Supplier Part Number 1=490-6928-1-ND, Tolerance=±5%, Category="Inductors, Coils, Chokes", ComponentLink1Description=https://datasheet.ciiva.com/6705/l0075s0080lqw18a-00-6705496.pdf, ComponentLink1URL=https://datasheet.ciiva.com/6705/l0075s0080lqw18a-00-6705496.pdf, ComponentLink2Description=https://datasheet.ciiva.com/6705/l0075s0080lqw18a-00-6705498.pdf, ComponentLink2URL=https://datasheet.ciiva.com/6705/l0075s0080lqw18a-00-6705498.pdf, ComponentLink3Description=https://datasheet.ciiva.com/6705/l0075s0080lqw18a-00-6705500.pdf, ComponentLink3URL=https://datasheet.ciiva.com/6705/l0075s0080lqw18a-00-6705500.pdf, ComponentLink4Description=https://datasheet.ciiva.com/11799/0900766b80a002db-11799164.pdf, ComponentLink4URL=https://datasheet.ciiva.com/11799/0900766b80a002db-11799164.pdf, Family="Fixed Inductors", Height - Seated (Max)="0.039\" (1.00mm)", Inductance=180nH, Material - Core=Non-Magnetic, Mounting Type="Surface Mount", Online Catalog="LQW Series", Other Names=490-6928-1, Packaging="Cut Tape (CT)", Pricing 1="1=0.17, 10=0.15, 25=0.1352, 50=0.117, 100=0.105, 250=0.0975, 500=0.09, 750=0.0855, 1000=0.078 (USD)", Product Training Modules="Inductor Products Chip RF Inductors", Series=LQW18A_00, Shielding=Unshielded, Size / Dimension="0.063\" L x 0.031\" W (1.60mm x 0.80mm)", Stock 1=2568, Supplier 1=Digikey, Type=Wirewound
LS1 LS2: "Loudspeaker", LatestRevisionDate=17-Jul-2002, LatestRevisionNote="Re-released for DXP Platform.", PackageReference=PIN2, Published=24-Mar-1999, Publisher="Altium Limited"
Q1 Q2 Q3 Q4 Q5 Q6: "PNP Bipolar Transistor"
Q7: "P-Channel MOSFET", LatestRevisionDate=17-Jul-2002, LatestRevisionNote="Re-released for DXP Platform.", PackageDescription="TO, Flat Index; 3 In-Line, Axial Leads; Body Dia. 4.6mm; Lead Dia. 0.5 mm (max)", PackageReference=E3, PackageVersion=1995/1996, Published=8-Jun-2000, Publisher="Altium Limited"
R1 R2 R3 R4 R5 R6 R7 R8 R9 R10 R11 R12 R13 R14 R15 R16 R17 R18 R19 R20 R21 R22 R23 R24 R25 R26 R27 R28 R29 R30 R31 R32 R33 R34 R35 R36 R37 R38 R39 R40 R42 R43 R44 R45 R46 R47 R48 R49 R50 R51 R52 R53 R54 R55 R56 R57 R58 R59: library part Res3, "Resistor", LatestRevisionDate=29-May-2009, LatestRevisionNote="IPC-7351 Footprint Added.", PackageDescription="Chip Resistor", PackageReference=J1-0603, Published=8-Jun-2000, Publisher="Altium Limited"
R41: "Variable Resistor", ComponentLink1Description="A Photocell Datasheet", ComponentLink1URL=http://cdn.sparkfun.com/datasheets/Sensors/LightImaging/SEN-09088.pdf
S1 S2 S3 S4 S5 S6 S7 S8: "Switch"
U1: library part CMP-0095-00651-1, "8-bit AVR Microcontroller, 3.0-5.5V, 128KB Flash, 4KB EEPROM, 4KB SRAM, 64-pin TQFP, Extended Grade (-40°C to 105°C)", Code_JEDEC=MS-026-AEB, ComponentLink1Description="Manufacturer URL", ComponentLink1URL=http://www.atmel.com/, ComponentLink2Description="ATmega128(L) Datasheet", ComponentLink2URL=http://www.atmel.com/dyn/resources/prod_documents/doc2467.pdf, ComponentLink3Description="ATmega128(L) Summary", ComponentLink3URL=http://www.atmel.com/dyn/resources/prod_documents/2467S.pdf, DatasheetVersion="revX, Jun-2011", PackageDescription="64-Pin Plastic Thin Profile Quad Flat Pack, 14 x 14 x 1.0 mm Body, 0.8 mm Pitch (TQFP)", PackageReference=64A, PackageVersion="revC, Oct-2010"
U2: library part CMP-1633-00157-2, "High Speed CMOS Logic 3-to-8 Line Decoder Demultiplexer Inverting and Non-Inverting, D0016A, LARGE T&R", F @ Nom Voltage(Max)(Mhz)=28, Generic Part Number=CD74HC138, ICC @ Nom Voltage(Max)(mA)=0.08, Manufacturer="Texas Instruments", Operating Temperature Range(C)="-55 to 125", Rating=Catalog, tpd @ Nom Voltage(Max)(ns)=30, Voltage(Nom)(V)=3.3,5, Bits(#)=8, Channels(#)=1, Code_JEDEC="MS-012 variation AC", Configuration=3:8, DatasheetVersion=SCHS147I, Function=Decoder/Demultiplexer, Input Type=LVTTL/CMOS, Output Drive (IOL/IOH)(Max)(mA)=5.2/-5.2, Output Type=CMOS, PackageReference=D0016A, Schmitt Trigger=No, Technology Family=HC, Type=Standard, VCC(Max)(V)=6, VCC(Min)(V)=2
U3: library part CMP-0859-00281-3, "Single Bus Buffer Gate With 3-State Outputs, DCK0005A, LARGE T&R", F @ Nom Voltage(Max)(Mhz)=150, Generic Part Number=SN74LVC1G125, ICC @ Nom Voltage(Max)(mA)=0.01, Manufacturer="Texas Instruments", Operating Temperature Range(C)="-40 to 125,-40 to 85", Rating=Catalog, tpd @ Nom Voltage(Max)(ns)=9,5.5,4.5,4, Voltage(Nom)(V)=1.8,2.5,3.3,5, 3-State Output=Yes, Bits(#)=1, DatasheetVersion=SCES223T, Input Type=CMOS/TTL, Logic=True, Output Drive (IOL/IOH)(Max)(mA)=32/-32, Output Type=CMOS, PackageReference=DCK0005A, PartId=1, Schmitt Trigger=No, Sub-Family="Non-Inverting Buffer/Driver", Technology Family=LVC, VCC(Max)(V)=5.5, VCC(Min)(V)=1.65
U5: library part CMP-0807-00025-1, "8-Bit Shift Registers With 3-State Output Registers, D0016A, LARGE T&R", F @ Nom Voltage(Max)(Mhz)=28, ICC @ Nom Voltage(Max)(mA)=0.08, Operating Temperature Range(C)="-55 to 125", Part Number=CD74HC595, Rating=Catalog, tpd @ Nom Voltage(Max)(ns)=41, Voltage(Nom)(V)=6, 3-State Output=Yes, Bits=8, Code_IPC="MS-012 variation AC", ComponentLink1Description="Manufacturer URL", ComponentLink1URL=http://www.ti.com/, ComponentLink2Description=Datasheet, ComponentLink2URL=http://www.ti.com/lit/ds/symlink/cd74hc595.pdf, DatasheetVersion=SCHS353, Input Type=CMOS, No. of Outputs=9, Output Drive (IOL/IOH)(Max)(mA)=7.8/-7.8, Output Type=CMOS, PackageReference=D0016A, PackageVersion=http://www.ti.com/lit/ml/mpds178g/mpds178g.pdf, PartNumber=CD74HC595M96, Technology Family=HC, VCC(Max)(V)=6, VCC(Min)(V)=2
U6: library part CMP-0780-00020-1, "8-Bit Parallel-Load Shift Registers, D0016A, LARGE T&R", F @ Nom Voltage(Max)(Mhz)=28, ICC @ Nom Voltage(Max)(mA)=0.08, Operating Temperature Range(C)="-40 to 125", Part Number=SN74HC165, Rating=Catalog, tpd @ Nom Voltage(Max)(ns)=38, Voltage(Nom)(V)=6, 3-State Output=No, Bits=8, Code_IPC="MS-012 variation AC", ComponentLink1Description="Manufacturer URL", ComponentLink1URL=http://www.ti.com/, ComponentLink2Description=Datasheet, ComponentLink2URL=http://www.ti.com/lit/ds/symlink/sn74hc165.pdf, DatasheetVersion=SCLS116G, Input Type=CMOS, Output Drive (IOL/IOH)(Max)(mA)=5.2/-5.2, Output Type=CMOS, PackageReference=D0016A, PackageVersion=http://www.ti.com/lit/ml/mpds178g/mpds178g.pdf, PartNumber=SN74HC165DR, Technology Family=HC, VCC(Max)(V)=6, VCC(Min)(V)=2
U7: library part CMP-0055-00692-3, "CMOS Dual Operational Amplifier, 8-pin Narrow SOIC", Manufacturer="Texas Instruments", Package Reference=D0008A, PackageTopMarking=NSZXTT*LMC60*32IM, PowerWise=N, Code_IPC=SOIC127P600-8, Code_JEDEC=MS-012-AA, ComponentLink1Description="Datasheet URL", ComponentLink1URL=http://www.ti.com/general/docs/lit/getliterature.tsp?genericPartNumber=LMC6032&fileType=pdf, CompType=Amplifiers, PackageDescription="SOIC Narrow, 4.9 x 3.9 x 1.45mm, 8 Lead, 1.27mm Pitch", PartId=1, PinCount=8, RoHS=N
U8: "Audio Amplifier"
U9: library part CMP-0066-00221-3, "2.7V, 11- to 14- Bit Digital Temperature Sensor with 2-Wire Interface, 6-pin Tiny SOT23, Pb-Free", Manufacturer="Texas Instruments", PackageTopMarking=T730*XTT, PowerWise=Y, Code_IPC=SOT26A-6, Code_JEDEC=MO-193-AA, ComponentLink1Description="Datasheet URL", ComponentLink1URL=http://www.ti.com/general/docs/lit/getliterature.tsp?genericPartNumber=LM73&fileType=pdf, CompType="Temp Sensor IC", PackageDescription="Molded TSOT, 2.97 x 1.65 x 0.87mm Body, 6 Lead, 0.95mm Pitch", PackageReference=DDC0006A, PinCount=6, RoHS=Y
U10: library part CMP-0935-00001-1, "RS-232 Transceiver with 2-Drivers / 2-Receivers, 3 to 5.5 V, 250 Kbps, 16-Pin NSOIC, 0 to 70 degC, Pb-free, Tape and Reel", Manufacturer="Exar Corporation", Temp. Range="0 to 70 degC", ComponentLink1Description="Manufacturer URL", ComponentLink1URL=http://www.exar.com/, ComponentLink2Description=Datasheet, ComponentLink2URL=https://www.exar.com/common/content/document.ashx?id=632&languageid=1033, Data Rate="250 Kbps", DatasheetVersion="Rev. 1.0.2", ESD="15 KV", Mounting Technology="Surface Mount", No. of Rx=2, No. of Tx=2, PackageDescription="16-Pin Small Outline Integrated Circuit, Body 9.9 x 3.9 mm, Pitch 1.27 mm", PackageReference=NSOIC-16, Packing="Tape and Reel", PartNumber=SP3232EBCN-L/TR, VCC="3 to 5.5 V"
U11: Case/Package=SOT-23-5, Dropout Voltage=140, Manufacturer="Fairchild Semiconductor", Manufacturer Part Number=FAN2500S33X, Max Input Voltage=6.5, Max Operating Temperature=125, Max Ouput Current=100, Min Input Voltage=2.7, Min Operating Temperature=-40, Nominal Output Voltage=3.3, Package Quantity=3000, Supplier Part Number 1=FAN2500S33XCT-ND, ComponentLink1Description=https://datasheet.ciiva.com/4886/fan2500-192391-4886672.pdf, ComponentLink1URL=https://datasheet.ciiva.com/4886/fan2500-192391-4886672.pdf, ComponentLink2Description=https://datasheet.ciiva.com/8239/fan2501-8239552.pdf, ComponentLink2URL=https://datasheet.ciiva.com/8239/fan2501-8239552.pdf, ComponentLink3Description=https://datasheet.ciiva.com/16747/fan2500-16747543.pdf, ComponentLink3URL=https://datasheet.ciiva.com/16747/fan2500-16747543.pdf, ComponentLink4Description=https://datasheet.ciiva.com/46426/1727616-46426263.pdf, ComponentLink4URL=https://datasheet.ciiva.com/46426/1727616-46426263.pdf, ComponentLink5Description=https://datasheet.ciiva.com/8241/fan2501-8241034.pdf, ComponentLink5URL=https://datasheet.ciiva.com/8241/fan2501-8241034.pdf, ComponentLink6Description=https://datasheet.ciiva.com/2039/fan2500-2039339.pdf, ComponentLink6URL=https://datasheet.ciiva.com/2039/fan2500-2039339.pdf, ComponentLink7Description=https://datasheet.ciiva.com/48696/001252307-da-01-en-ic-reg-ldo-3-3v-fan2500s33x-sot-23-5-fsc-48696763.pdf, ComponentLink7URL=https://datasheet.ciiva.com/48696/001252307-da-01-en-ic-reg-ldo-3-3v-fan2500s33x-sot-23-5-fsc-48696763.pdf, ComponentLink8Description=https://datasheet.ciiva.com/2039/fan2500-2039340.pdf, ComponentLink8URL=https://datasheet.ciiva.com/2039/fan2500-2039340.pdf, Mount="Surface Mount", Output Current=100, Outputs=1, Output Voltage=3.3, Packaging="Tape and Reel", Pins=5, Pricing 1="1=0.63, 10=0.557, 100=0.4259, 500=0.3374, 1000=0.2703 (USD)", Radiation Hardening=No, REACH SVHC="No SVHC", Stock 1=32735, Supplier 1=Digikey
U12 U14: library part CMP-1063-00149-1, "1-Channel Low Capacitance ESD Protection Array, 3-Pin SOT-23, Pb-Free, Tape and Reel", Capacitance=1.2, Case/Package=TO-236-3, Current Rating=8, Manufacturer="On Semiconductor", Max Operating Temperature=85, Min Operating Temperature=-40, Package Quantity=3000, Supplier Part Number 1=CM1213A-01SOOSCT-ND, Channels=1, C Max (pF)=1.2, ComponentLink1Description="Manufacturer URL", ComponentLink1URL=http://www.onsemi.com/, ComponentLink2Description=Datasheet, ComponentLink2URL=http://www.onsemi.com/pub_link/Collateral/CM1213A.PDF, ComponentLink3Description="Package Specification", ComponentLink3URL=http://www.onsemi.cn/pub_link/Collateral/318-08.PDF, ComponentLink4Description=https://datasheet.ciiva.com/3304/cm1213a-d-3304000.pdf, ComponentLink4URL=https://datasheet.ciiva.com/3304/cm1213a-d-3304000.pdf, ComponentLink5Description=https://datasheet.ciiva.com/6577/cm1213a-d-6577910.pdf, ComponentLink5URL=https://datasheet.ciiva.com/6577/cm1213a-d-6577910.pdf, ComponentLink6Description=https://datasheet.ciiva.com/6577/cm1213a-d-6577911.pdf, ComponentLink6URL=https://datasheet.ciiva.com/6577/cm1213a-d-6577911.pdf, ComponentLink7Description=https://datasheet.ciiva.com/6577/cm1213a-d-6577912.pdf, ComponentLink7URL=https://datasheet.ciiva.com/6577/cm1213a-d-6577912.pdf, ComponentLink8Description=https://datasheet.ciiva.com/11193/cm1213a-d-11193820.pdf, ComponentLink8URL=https://datasheet.ciiva.com/11193/cm1213a-d-11193820.pdf, ComponentLink9Description=https://datasheet.ciiva.com/25958/cm1213a-d-25958253.pdf, ComponentLink9URL=https://datasheet.ciiva.com/25958/cm1213a-d-25958253.pdf, ComponentLink10Description=https://datasheet.ciiva.com/30478/0900766b8121ba52-30478863.pdf, ComponentLink10URL=https://datasheet.ciiva.com/30478/0900766b8121ba52-30478863.pdf, DatasheetVersion="Rev. 8", Direction=Unidirectional, Elements=1, Height=1.01, IR Max (uA)=1, Length=3.04, Manufacturer Part Number=CM1213A-01SO, Mount="Surface Mount", Mounting Technology="Surface Mount", Number of Lines=1, PackageDescription="3-Pin Small Outline Transistor, Body 2.92 x 1.3 mm, Pitch 0.95 mm", PackageReference=SOT-23-3-318-08, PackageVersion="Rev. AP, 11/2009", Packaging="Tape and Reel", Packing="Tape and Reel", PartNumber=CM1213A-01SO, Pins=3, PPK Max (W)=0.225, Pricing 1="1=0.47, 10=0.4, 100=0.2985, 500=0.2345, 1000=0.1812 (USD)", Radiation Hardening=No, RoHS=Pb-Free, Stock 1=2764, Supplier 1=Digikey, Width=1.4
U13: library part CMP-0501-00028-1, "Broadcast AM / FM / SW / LW Radio Receiver, -20 to 85 degC, 20-pin QFN, Tray", Case/Package=QFN, Frequency=1.71, Manufacturer="Silicon Labs", Manufacturer Part Number=SI4734-D60-GM, Max Operating Temperature=85, Min Operating Temperature=-20, Package Quantity=490, Supplier Part Number 1=SI4734-D60-GM-ND, Code_IPC=J-STD-020, ComponentLink1Description="Manufacturer URL", ComponentLink1URL=http://www.silabs.com/, ComponentLink2Description=Datasheet, ComponentLink2URL="http://www.silabs.com/Support Documents/TechnicalDocs/Si4730-31-34-35-D60.pdf", ComponentLink3Description="Package Specification", ComponentLink3URL=http://www.silabs.com/Support%20Documents/TechnicalDocs/C8051F99x.pdf, ComponentLink4Description=https://datasheet.ciiva.com/2798/si4730-31-34-35-d60-2798829.pdf, ComponentLink4URL=https://datasheet.ciiva.com/2798/si4730-31-34-35-d60-2798829.pdf, ComponentLink5Description=https://datasheet.ciiva.com/8147/si4730-31-34-35-d60-8147549.pdf, ComponentLink5URL=https://datasheet.ciiva.com/8147/si4730-31-34-35-d60-8147549.pdf, DatasheetVersion="Rev. 1.2", Mount="Surface Mount", Mounting Technology="Surface Mount", PackageDescription="20-Pin Quad-Flat No-Leads Package, Body 3 x 3 mm, Pitch 0.5 mm", PackageReference=QFN-20, Packaging=Tray, PartNumber=Si4734-D60-GM, Pins=20, Pricing 1="1=14.64, 25=14.1024, 100=13.56, 1000=2.4634 (USD)", Radiation Hardening=No, RDS Support=FALSE, Stock 1=624, Sub-Family="AM/FM, Shortwave, Longwave, Weather Band Receivers", Supplier 1=Digikey
Y1: library part "XTAL GENERIC", "Crystal Oscillator", Frequency=12MHz

## Nets (pads, with @x,y where several pads share a name; then routed paths per layer and width w, separated by ;. In a path a pad name is that pad's centre, name@x,y a point inside that pad or via, vN(x,y) a via of type N, cw(c..) or ccw(c..) an arc to the next point about the centre after c; other vN are vias at no path point)
3v3_SYS: C24.2 U10.16
5v_SYS: C1.2 C13.1 C14.2 C15.2 C16.1 C17.2 C19.2 C35.2 J3.2 Q6.3 R18.2 R19.2 R20.2 R21.2 R22.1 R24.1 R25.1 R26.1 R34.1 R39.1 R41.2 R43.1 R46.2 R47.2 U1.21 U1.52 U1.62 U1.64 U2.6 U2.16 U3.5 U5.16 U7.8 U8.3 U8.6 U8.9 U9.3 U15.10
GND: C1.1 C2.1 C5.1 C6.1 C8.1 C10.1 C11.1 C12.1 C13.2 C14.1 C15.1 C16.2 C17.1 C18.1 C19.1 C22.1 C23.1 C24.1 C26.1 C27.1 C28.1 C29.1 C33.1 C34.1 C35.1 D9.2 D10.2 D11.2 D12.2 D13.2 D14.2 D15.2 D16.2 J2.5 J3.6 L1.1 Q7.3 R35.1 R40.1 R42.1 R44.1 R54.1 R55.1 SW1.2 SW2.2 T1.3 U1.22 U1.53 U1.63 U2.4 U2.5 U2.8 U3.2 U3.3 U5.8 U6.8 U7.4 U8.1 U8.11 U8.17 U9.2 U10.8 U10.10 U10.15 U11.2 U12.2 U12.3 U13.3 U13.12 U13.21 U14.2 U14.3 U15.4 U15.9
NetC2_2: C2.2 U6.16
NetC3_1: C3.1 C4.1 U1.29
NetC3_2: C3.2 R31.2
NetC4_2: C4.2 R36.2
NetC5_2: C5.2 R39.2 R40.2 U7.3
NetC6_2: C6.2 R34.2 R35.2 U7.5
NetC7_1: C7.1 R32.1 U7.7
NetC7_2: C7.2 U8.4
NetC8_2: C8.2 C18.2 R45.2 U8.18
NetC9_1: C9.1 R37.1 U7.1
NetC9_2: C9.2 U8.8
NetC10_2: C10.2 U8.5
NetC11_2: C11.2 U8.16
NetC12_2: C12.2 U8.7
NetC20_1: C20.1 U10.3
NetC20_2: C20.2 U10.1
NetC21_1: C21.1 U10.5
NetC21_2: C21.2 U10.4
NetC22_2: C22.2 U10.2
NetC23_2: C23.2 U10.6
NetC25_1: C25.1 U13.4
NetC25_2: C25.2 T1.1 U12.1
NetC28_2: C28.2 U11.1
NetC29_2: C29.2 U11.4
NetC30_1: C30.1 U13.14
NetC30_2: C30.2 R38.2
NetC31_1: C31.1 L1.2 U13.2 U14.1
NetC31_2: C31.2
NetC32_1: C32.1 U13.13
NetC32_2: C32.2 R33.2
NetC33_2: C33.2 U13.17 Y1.2
NetC34_2: C34.2 U13.9 Y1.1
NetD1_1: D1.1 R8.1 U1.51
NetD1_2: D1.2 S1.1
NetD2_1: D2.1 R7.1 U1.50
NetD2_2: D2.2 S2.1
NetD3_1: D3.1 R6.1 U1.49
NetD3_2: D3.2 S3.1
NetD4_1: D4.1 R5.1 U1.48
NetD4_2: D4.2 S4.1
NetD5_1: D5.1 R4.1 U1.47
NetD5_2: D5.2 S5.1
NetD6_1: D6.1 R3.1 U1.46
NetD6_2: D6.2 S6.1
NetD7_1: D7.1 R2.1 U1.45
NetD7_2: D7.2 S7.1
NetD8_1: D8.1 R1.1 U1.44
NetD8_2: D8.2 S8.1
NetD9_1: D9.1 R10.2
NetD10_1: D10.1 R11.2
NetD11_1: D11.1 R12.2
NetD12_1: D12.1 R13.2
NetD13_1: D13.1 R14.2
NetD14_1: D14.1 R15.2
NetD15_1: D15.1 R16.2
NetD16_1: D16.1 R17.2
NetJ1_2: J1.2 U11.5
NetJ2_2: J2.2 U10.13
NetJ2_3: J2.3 U10.14
NetJ3_1: J3.1 R59.2 U1.13
NetJ3_3: J3.3 R58.2 U1.11
NetJ3_4: J3.4 R57.2 U1.12
NetJ3_5: J3.5 U1.20
NetJ8_1: J8.1 T1.4
NetJ8_2: J8.2 T1.6
NetLS1_1: LS1.1 U8.2
NetLS1_2: LS1.2 U8.20
NetLS2_1: LS2.1 U8.10
NetLS2_2: LS2.2 U8.12
NetQ1_1: Q1.1 U4.8
NetQ1_2: Q1.2 R29.2
NetQ1_3: Q1.3 Q2.3 Q3.3 Q4.3 Q5.3 Q6.1
NetQ2_1: Q2.1 U4.6
NetQ2_2: Q2.2 R28.2
NetQ3_1: Q3.1 U4.4
NetQ3_2: Q3.2 R27.2
NetQ4_1: Q4.1 U4.2
NetQ4_2: Q4.2 R23.2
NetQ5_1: Q5.1 U4.1
NetQ5_2: Q5.2 R9.2
NetQ6_2: Q6.2 R30.2
NetQ7_1: Q7.1 R49.1 U13.5
NetQ7_2: Q7.2 R55.2 U1.4
NetR1_2: R1.2 U4.7
NetR2_2: R2.2 U4.15
NetR3_2: R3.2 U4.11
NetR4_2: R4.2 U4.5
NetR5_2: R5.2 U4.3
NetR6_2: R6.2 U4.13
NetR7_2: R7.2 U4.16
NetR8_2: R8.2 U4.14
NetR9_1: R9.1 U2.11
NetR10_1: R10.1 U5.15
NetR11_1: R11.1 U5.1
NetR12_1: R12.1 U5.2
NetR13_1: R13.1 U5.3
NetR14_1: R14.1 U5.4
NetR15_1: R15.1 U5.5
NetR16_1: R16.1 U5.6
NetR17_1: R17.1 U5.7
NetR18_1: R18.1 SW1.1 U6.11
NetR19_1: R19.1 SW1.3 U6.12
NetR20_1: R20.1 SW2.1 U6.13
NetR21_1: R21.1 SW2.3 U6.14
NetR22_2: R22.2 U6.6
NetR23_1: R23.1 U2.12
NetR24_2: R24.2 U6.5
NetR25_2: R25.2 U6.4
NetR26_2: R26.2 U6.3
NetR27_1: R27.1 U2.13
NetR28_1: R28.1 U2.14
NetR29_1: R29.1 U2.15
NetR30_1: R30.1 U1.17
NetR31_1: R31.1 R32.2 R33.1 U7.6
NetR36_1: R36.1 R37.2 R38.1 U7.2
NetR41_1: R41.1 R42.2 U1.61
NetR43_2: R43.2 U8.14
NetR44_2: R44.2 U8.15
NetR45_1: R45.1 U1.5
NetR46_1: R46.1 U1.25 U9.4 U15.8
NetR47_1: R47.1 U1.26 U9.6 U15.7
NetR48_1: R48.1 U13.19
NetR48_2: R48.2
NetR50_1: R50.1 U13.7 U15.5
NetR51_1: R51.1 U13.8 U15.6
NetR52_1: R52.1 R54.2 U13.6
NetR53_1: R53.1 U13.18
NetR53_2: R53.2 R56.1 U15.1
NetR57_1: R57.1 U5.14
NetR58_1: R58.1 U5.11 U6.2
NetR59_1: R59.1 U6.9
NetS1_2: S1.2 S2.2 S3.2 S4.2 S5.2 S6.2 S7.2 S8.2 U3.4
NetU1_2: U1.2 U10.12
NetU1_3: U1.3 U10.11
NetU1_6: U1.6 U6.1
NetU1_8: U1.8 U6.15
NetU1_9: U1.9 U15.12
NetU1_14: U1.14 U2.1
NetU1_15: U1.15 U2.2
NetU1_16: U1.16 U2.3
NetU2_7: U2.7 U3.1
NetU10_9: U10.9
NetU11_3: U11.3
RADIO_VDD: C26.2 C27.2 J1.1 R49.2 R50.2 R51.2 R52.2 R56.2 U13.10 U13.11 U15.3
pads on no net: J2.1 J2.4 J2.6 J2.7 J2.8 J2.9 J2.A J4.A J5.A J6.A J7.A S1.A S2.A S3.A S4.A S5.A S6.A S7.A S8.A SW1.A SW2.A T1.2 T1.5 U1.1 U1.7 U1.10 U1.18 U1.19 U1.23 U1.24 U1.27 U1.28 U1.30 U1.31 U1.32 U1.33 U1.34 U1.35 U1.36 U1.37 U1.38 U1.39 U1.40 U1.41 U1.42 U1.43 U1.54 U1.55 U1.56 U1.57 U1.58 U1.59 U1.60 U2.9 U2.10 U4.9 U4.10 U4.12 U5.9 U5.10 U5.12 U5.13 U6.7 U6.10 U8.13 U8.19 U9.1 U9.5 U10.7 U13.1 U13.15 U13.16 U13.20 U15.2 U15.11

## Other copper
Bottom Layer:
  text "TODO: Get new osc?" at 134.875,121.125 h0.8

## Silkscreen, mask and mechanical layers (free items; w line width, h text height)
Top Overlay:
  lines w0.2: 46.362,86.126 45.612,85.376 45.612,77.751 46.612,76.751 ; 46.487,86.126 76.362,86.126 77.362,85.126 77.362,77.751 76.362,76.751 46.737,76.751
  text "Station Signal Strength" at 55.625,88.25 h0.8
  text "Temperature Sensor" at 1.591,82.416 h0.8 r270
  text "Signal Strength" at 51.737,76.751 h3 r90
  text "VOLUME" at 73.375,49.75 h3 r90
  text "I2C Pullup" at 17.25,31.75 h0.8
  text "Photocell" at 27.339,29.673 h0.8
  text "TUNE" at 73.375,20.875 h3 r90
Mechanical 1:
  lines w0.2: 0,3.625 0,96.25 cw(c3.75,96.25) 3.75,100 36.5,100 cw(c36.5,96.25) 40.25,96.25 40.25,90.875 ccw(c44,90.875) 44,87.125 76.25,87.125 cw(c76.25,83.375) 80,83.375 80,3.75 cw(c76.25,3.75) 76.25,0 3.625,0 ; 0,3.75 ccw(c3.75,3.75) 3.75,0

## Text inside footprints (layer, text, board x,y; h text height)
C13: Top Overlay "+" at 48.375,58.325 h1
C16: Top Overlay "+" at 40.5,79.137 h1 r180
Q1: Top Overlay "C B E" at 6.618,53.44 h1 r90
Q2: Top Overlay "C B E" at 6.618,59.062 h1 r90
Q3: Top Overlay "C B E" at 6.618,64.683 h1 r90
Q4: Top Overlay "C B E" at 6.618,70.305 h1 r90
Q5: Top Overlay "C B E" at 5.983,81.046 h1 r180
Q6: Top Overlay "C B E" at 6.618,47.819 h1 r90
Q7: Bottom Overlay "1" at 56.1,35.006 h1.5; Bottom Overlay "3" at 56.1,32.488 h1.5